# Altium PCB ClockBoard.PcbDoc
Units mil, origin at the board's own origin, x right, y up, seen from the top; angles counter-clockwise.
Board outline 6300 x 1510 mil, 2 copper layers (Top Layer, Bottom Layer); 37 components, 44 nets, 160 pads, 67 vias.
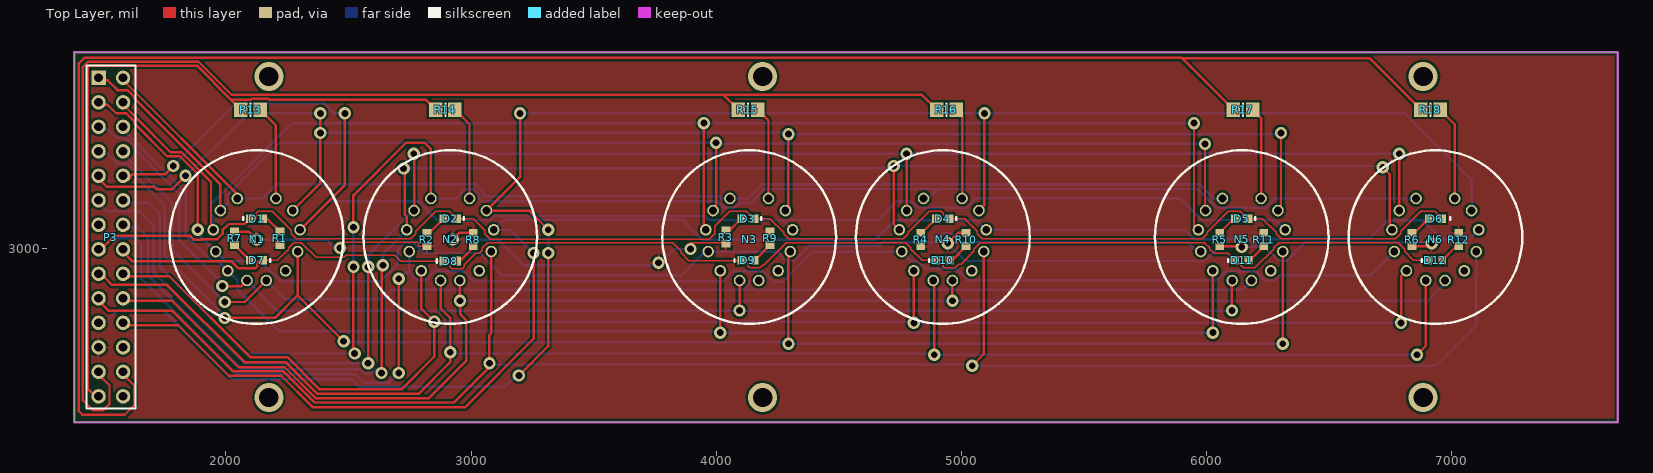
[diagram p0: Top Layer view]
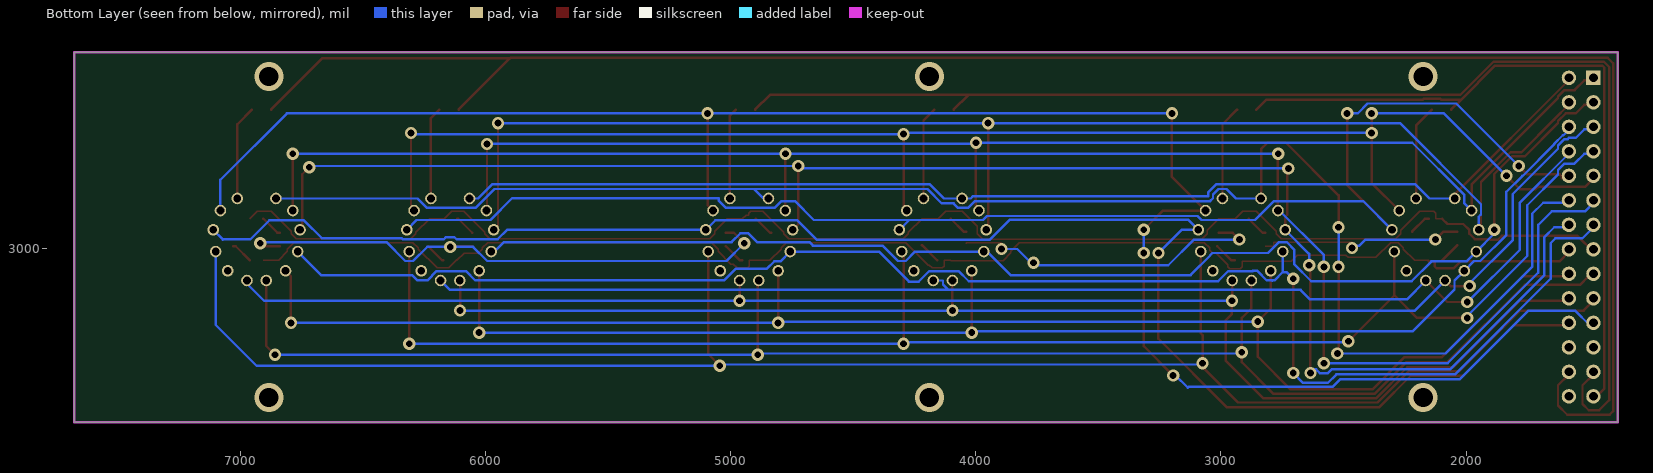
[diagram p1: Bottom Layer view, seen from below]

## Layer stack, top to bottom
Top Solder: solder mask 0.4, Solder Resist, Dk 3.5
Top Layer: signal copper 1.4
Dielectric 1: dielectric 12.6, FR-4, Dk 4.8
Bottom Layer: signal copper 1.4
Bottom Solder: solder mask 0.4, Solder Resist, Dk 3.5

## Board outline
1380,2290 7680,2290 7680,3800 1380,3800

## Design rules (kind name [scope] priority, off if disabled: settings)
Clearance [All] p1: gap=10 ignorepadtopadclearanceinfootprint=FALSE except(0: Arc-Hole Track-Hole SMDPad-Hole THPad-Hole Via-Hole Fill-Hole Poly-Hole Region-Hole Text-Hole; 6: Arc-Arc Arc-Track Track-Track)
ComponentClearance [All] p1: gap=0 collisioncheckmode=3 verticalgap=10 showdistances=FALSE
PolygonConnect [All] p1: connectstyle=Relief reliefconductorwidth=10 reliefentries=4 polygonreliefangle="90 Angle" airgapwidth=10
RoutingVias [All] p1: holewidth=28 width=50 viastyle="Through Hole" minholewidth=28 minwidth=50 maxholewidth=28 maxwidth=50
SolderMaskExpansion [All] p1: expansion=4
Width [All] p1: maxlimit=25 minlimit=6 preferedwidth=10 bottomlayer_minwidth=8 minimp=50.000000 maximp=50.000000 favimp=50.000000
29 further rules are at their usual default settings.

## Components (designator, comment, footprint, x,y, rotation, side; value= is the part's Value field where it differs from the comment)
D1 "BlueLED" 1608[0603] 2125,3120 r180 top
D2 "BlueLED" 1608[0603] 2915,3120 r0 top
D3 "BlueLED" 1608[0603] 4130,3120 r0 top
D4 "BlueLED" 1608[0603] 4925,3120 r0 top
D5 "BlueLED" 1608[0603] 6145,3120 r0 top
D6 "BlueLED" 1608[0603] 6935,3120 r0 top
D7 "BlueLED" 1608[0603] 2125,2950 r0 top
D8 "BlueLED" 1608[0603] 2915,2947.32 r180 top
D9 "BlueLED" 1608[0603] 4130,2950 r180 top
D10 "BlueLED" 1608[0603] 4925,2950 r180 top
D11 "BlueLED" 1608[0603] 6145,2950 r180 top
D12 "BlueLED" 1608[0603] 6935,2950 r180 top
N1 "IN-8-2: medium numeric frontview nixie tube" IN-8-2 2125,3045 r180 top locked
N2 "IN-8-2: medium numeric frontview nixie tube" IN-8-2 2915,3045 r180 top locked
N3 "IN-8-2: medium numeric frontview nixie tube" IN-8-2 4135,3045 r180 top locked
N4 "IN-8-2: medium numeric frontview nixie tube" IN-8-2 4925,3045 r180 top locked
N5 "IN-8-2: medium numeric frontview nixie tube" IN-8-2 6145,3045 r180 top locked
N6 "IN-8-2: medium numeric frontview nixie tube" IN-8-2 6935,3045 r180 top locked
P3 "Header 14X2A" HDR2X14_CEN 1480,3695 r270 top
R1 "Res1" 1608[0603] 2220,3040 r90 top value=1K
R2 "Res1" 1608[0603] 2820,3035 r90 top value=1K
R3 "Res1" 1608[0603] 4040,3045 r90 top value=1K
R4 "Res1" 1608[0603] 4835,3035 r90 top value=1K
R5 "Res1" 1608[0603] 6055,3035 r90 top value=1K
R6 "Res1" 1608[0603] 6840,3035 r90 top value=1K
R7 "Res1" 1608[0603] 2035,3040 r270 top value=1K
R8 "Res1" 1608[0603] 3009.41,3035 r270 top value=1K
R9 "Res1" 1608[0603] 4220,3040 r270 top value=1K
R10 "Res1" 1608[0603] 5020,3035 r270 top value=1K
R11 "Res1" 1608[0603] 6235,3035 r270 top value=1K
R12 "Res1" 1608[0603] 7030,3035 r270 top value=1K
R13 "Res1" 6-0805_M 2100,3565 r180 top value=20K
R14 "Res1" 6-0805_M 2895,3565 r180 top value=20K
R15 "Res1" 6-0805_M 4130,3565 r180 top value=20K
R16 "Res1" 6-0805_M 4940,3565 r180 top value=20K
R17 "Res1" 6-0805_M 6150,3565 r180 top value=20K
R18 "Res1" 6-0805_M 6915,3565 r180 top value=20K

## Footprints (in the part's own frame and the unit in brackets; to place one, negate y for a bottom-side part, rotate by r counter-clockwise, add the part's x,y. Pads: shape width x height; smd on the part's side, far side on the other; paste and mask are expansions set on the pad)
6-0805_M [mm] "Chip Resistor, Body 2.0x1.2mm, IPC Low Density"
  rect 1.4x1.5 smd: 1(-1,0) 2(1,0)
  silkscreen extent 0,-0.65 0,0.65, body extent -1.07,-0.7 1.07,0.7, height 0.7
1608[0603] [mm] "Chip Capacitor, Body 1.6x0.8mm, IPC High Density"
  rect 0.8x0.9 smd: 1(-0.7,0) 2(0.7,0)
  body extent -0.87,-0.48 0.87,0.48, height 1.3
HDR2X14_CEN [mm] "Connector; Header; 14x2 Position"
  rect 1.5x1.5 hole 0.9: 1(0,0)
  round 1.5 hole 0.9: 2(2.54,0) 3(5.08,0) 4(7.62,0) 5(10.16,0) 6(12.7,0) 7(15.24,0) 8(17.78,0) 9(20.32,0) 10(22.86,0) 11(25.4,0) 12(27.94,0) 13(30.48,0) 14(33.02,0) 15(0,2.54) 16(2.54,2.54) 17(5.08,2.54) 18(7.62,2.54) 19(10.16,2.54) 20(12.7,2.54) 21(15.24,2.54) 22(17.78,2.54) 23(20.32,2.54) 24(22.86,2.54) 25(25.4,2.54) 26(27.94,2.54) 27(30.48,2.54) 28(33.02,2.54)
  silkscreen extent -1.27,-1.27 34.29,3.81
IN-8-2 [mil]
  round 47.25 / inner round 60 / far side round 47.25 hole 31.5: 0(-147.64,-108.27) 1(78.74,-157.48) 2(147.64,-108.27) 3(177.17,-29.53) 4(167.32,59.06) 5(118.11,137.8) 6(39.37,177.17) 7(-39.37,177.17) 8(-167.32,59.06) 9(-177.17,-29.53) .(-118.11,137.8) A(-78.74,-157.48)
  silkscreen extent -354,-354 354,354

## Part data
D1 D2 D3 D4 D5 D6 D7 D8 D9 D10 D11 D12: library part Diode, "Default Diode", Code_JEDEC=DO-214-AB, LatestRevisionDate=17-Jul-2002, LatestRevisionNote="Re-released for DXP Platform.", PackageDescription="DO-214-AB/SMC; 2 C-Bend Leads; Body 7.9 x 5.9 mm, inc. leads (LxW)", PackageReference=SMC, PackageVersion=Sep-1996, Published=8-Jun-2000, Publisher="Altium Limited"
N1 N2 N3 N4 N5 N6: library part IN-8-2, DeviceSetName=IN-8-2, GateName_1=G$1, LibraryName=nixie-tubes, Package=IN-8-2, SymbolName_1=IN-8-2
P3: "Header, 14-Pin, Dual row", LatestRevisionDate=17-Jul-2002, LatestRevisionNote="Re-released for DXP Platform.", Publisher="Altium Limited", System=Connector
R1 R2 R3 R4 R5 R6 R7 R8 R9 R10 R11 R12 R13 R14 R15 R16 R17 R18: "Resistor", LatestRevisionDate=17-Jul-2002, LatestRevisionNote="Re-released for DXP Platform.", PackageDescription="Axial Device, Thru-Hole; 2 Leads; 0.3 in Pin Spacing", PackageReference=AXIAL-0.3, Published=8-Jun-2000, Publisher="Altium Limited"

## Via types
v1: diameter 50, hole 28, Top Layer to Bottom Layer, 61 vias
v2: diameter 118.11, hole 78.74, Top Layer to Bottom Layer, 6 vias

## Nets (pads, with @x,y where several pads share a name; then routed paths per layer and width w, separated by ;. In a path a pad name is that pad's centre, name@x,y a point inside that pad or via, vN(x,y) a via of type N, cw(c..) or ccw(c..) an arc to the next point about the centre after c; other vN are vias at no path point)
3V3: P3.12 R1.1 R2.1 R3.1 R4.1 R5.1 R6.1 R7.1 R8.1 R9.1 R10.1 R11.1 R12.1 | length 4523.6
  Top Layer w6: v1(2465,3000) 2465,3024.65 2784.3,3024.65 2784.3,3007.44 R2.1 ; v1(3895.68,2996.29) 3895.68,3022.57 4040,3022.57 R3.1
  Top Layer w10: R7.1 2092.44,3067.56 v1(2125,3035) ; v1(2925,3035) 2952.56,3062.56 R8.1 ; v1(4945,3020) 4987.56,3062.56 R10.1 ; R5.1 6142.56,3007.44 v1(6145,3005) ; R6.1 6907.44,3007.44 v1(6920,3020)
  Bottom Layer w10: v1(2125,3035) 2410,3035 2435,3010 2455,3010 v1(2465,3000) ; v1(2925,3035) 3110,3035 3215,2930 3765,2930 3831.29,2996.29 v1(3895.68,2996.29) ; v1(4945,3020) 5017.69,2947.32 5993.68,2947.32 6051.36,3005 v1(6145,3005) 6238.64,3005 6296.32,2947.32 6328.32,2947.32 6405.57,3024.57 6915.44,3024.57 v1(6920,3020)
  other v1: 3765,2940
LED1: D1.2 D2.2 D3.2 D4.2 D5.2 D6.2 P3.8 | length 6138.6
  Top Layer w6: D1.2 2123.81,3120 2123.81,3143.1 2131.43,3150.72 2188.69,3150.72 2265.55,3073.86 2265.55,3059.36 2287,3037.91 2449.16,3037.91 2449.26,3038 2722.56,3038 2722.66,3037.91 2753,3037.91 2774.45,3059.36 2774.45,3068.86 2856.31,3150.72 2911.84,3150.72 D2.2 3009.41,3120 3055.55,3073.86 3055.55,3059.36 3077.9,3037 3972.1,3037 3994.45,3059.36 3994.45,3089.1 4056.07,3150.72 4123.57,3150.72 4154.29,3120 D3.2 4219.41,3120 4275.55,3063.86 4275.55,3059.36 4297,3037.91 4763,3037.91 4784.45,3059.36 4784.45,3064.45 4870.72,3150.72 4918.57,3150.72 4926.19,3143.1 4926.19,3135 4937.56,3135 D4.2 5014.41,3120 5065.55,3068.86 5065.55,3059.36 5087,3037.91 5983,3037.91 6004.45,3059.36 6004.45,3064.45 6090.72,3150.72 6138.57,3150.72 6172.56,3116.73 D5.2 6229.41,3120 6285.55,3063.86 6285.55,3059.36 6307,3037.91 6773,3037.91 6794.45,3059.36 6794.45,3068.86 6876.31,3150.72 6931.84,3150.72 D6.2
  Top Layer w10: P3.8@1480,2985 1545,3050 1853.43,3050 1868.43,3035 1901.57,3035 1902.47,3035.91 1963.83,3035.91 1986.45,3058.53 1986.45,3073.69 2011.07,3098.31 2075.75,3098.31 D1.2
LED2: D7.2 D8.2 D9.2 D10.2 D11.2 D12.2 P3.22 | length 5874.1
  Top Layer w6: D7.2 2209.41,2950 2255.7,2996.29 2255.7,3001.11 2277.15,3022.57 2307.49,3022.57 2368.06,2962 2480.74,2962 2490.06,2971.32 2688.68,2971.32 2712.69,2947.31 D8.2 2913.81,2947.31 2913.81,2924.21 2921.43,2916.6 2963.69,2916.6 2971.31,2924.21 2971.31,2931.31 3018.69,2978.69 3033.11,2978.69 3045.7,2991.28 3045.7,3001.11 3067.15,3022.57 3822.43,3022.57 3857.68,2987.32 3857.68,2980.55 3888.92,2949.32 4101.76,2949.32 D9.2 4128.81,2950 4128.81,2926.9 4136.43,2919.28 4178.69,2919.28 4189.41,2930 4195,2930 4265.69,3000.7 4265.69,3001.11 4287.15,3022.57 4772.85,3022.57 4794.31,3001.11 4794.31,2996.29 4840.59,2950 D10.2 4923.81,2950 4923.81,2926.9 4931.43,2919.28 4973.69,2919.28 4989.41,2935 4999.41,2935 5050.72,2986.31 5050.72,2996.13 5077.15,3022.57 5992.85,3022.57 6014.31,3001.11 6014.31,2996.29 6031.9,2978.69 6088.75,2978.69 D11.2 6117.44,2953.27 6151.43,2919.28 6198.69,2919.28 6275.69,2996.29 6275.69,3001.11 6297.15,3022.57 6782.85,3022.57 6809.28,2996.13 6809.28,2986.31 6845.59,2950 D12.2
  Top Layer w10: P3.22@1580,2985 1619.17,2945.82 2022.89,2945.82 2051.43,2917.28 2119.4,2917.28 2128.19,2926.07 2128.19,2945 2150.24,2945 D7.2@2152.56,2947.32
MPX1: P3.14 R13.2 R14.2 | length 2929.4
  Top Layer w10: P3.14@1480,2385 1477.03,2385 1435.47,2426.56 1435.47,3735.74 1444.26,3744.53 1881.1,3744.53 2020.63,3605 ; R13.2 2020.63,3605 ; R14.2 2815.63,3605 2177.67,3605 2173.14,3609.53 2156.26,3609.53 2105.6,3609.53 2101.07,3605 2020.63,3605
MPX2: P3.13 R15.2 R16.2 | length 5296.8
  Top Layer w10: P3.13@1480,2485 1524.53,2440.47 1524.53,2363.44 1499.36,2338.27 1456.73,2338.27 1415.47,2379.53 1415.47,3738.37 1437.63,3760.53 1887.73,3760.53 2023.26,3625 2098.44,3625 2098.97,3625.53 4030.1,3625.53 ; R15.2 4030.1,3625.53 ; R16.2 4840.1,3625.53 4030.1,3625.53
MPX3: P3.27 R17.2 R18.2 | length 7682.4
  Top Layer w10: P3.27@1580,2485 1624.53,2440.47 1624.53,2357.8 1586.73,2320 1413.74,2320 1399.47,2334.27 1399.47,3754.47 1421.53,3776.53 5899.1,3776.53 5900.63,3775 ; R17.2 5900.63,3775 ; R18.2 6665.63,3775 5900.63,3775
NetD1_1: D1.1 R1.2 | length 89.2
  Top Layer w10: D1.1 2167.56,3120 R1.2
NetD2_1: D2.1 R2.2 | length 91.2
  Top Layer w10: R2.2 2830,3062.56 D2.1
NetD3_1: D3.1 R3.2 | length 84.2
  Top Layer w10: R3.2@4040,3067.56 4050,3067.56 D3.1
NetD4_1: D4.1 R4.2 | length 86.2
  Top Layer w10: R4.2 4840,3062.56 D4.1
NetD5_1: D5.1 R5.2 | length 86.2
  Top Layer w10: R5.2 6112.44,3120 D5.1
NetD6_1: D6.1 R6.2 | length 91.2
  Top Layer w10: R6.2 6850,3062.56 D6.1
NetD7_1: D7.1 R7.2 | length 88.3
  Top Layer w10: R7.2 D7.1
NetD8_1: D8.1 R8.2 | length 96.2
  Top Layer w10: D8.1@2942.56,2950 2957.56,2950 R8.2@3015,3007.44
NetD9_1: D9.1 R9.2 | length 88.3
  Top Layer w10: D9.1 R9.2
NetD10_1: D10.1 R10.2 | length 91.2
  Top Layer w10: D10.1 4962.56,2950 R10.2
NetD11_1: D11.1 R11.2 | length 86.2
  Top Layer w10: D11.1 6177.56,2950 R11.2
NetD12_1: D12.1 R12.2 | length 91.2
  Top Layer w10: D12.1 7020,3007.44 R12.2
NetN1_A: N1.A R13.1 | length 389.2
  Top Layer w10: R13.1 2203.74,3500.63 N1.A
NetN2_A: N2.A R14.1 | length 387.1
  Top Layer w10: R14.1 2993.74,3505.63 N2.A
NetN3_A: N3.A R15.1 | length 380.9
  Top Layer w10: R15.1 4213.74,3520.63 N3.A
NetN4_A: N4.A R16.1 | length 372.6
  Top Layer w10: R16.1 5003.74,3540.63 N4.A
NetN5_A: N5.A R17.1 | length 376.8
  Top Layer w10: R17.1 6223.74,3530.63 N5.A
NetN6_A: N6.A R18.1 | length 387.1
  Top Layer w10: R18.1 7013.74,3505.63 N6.A
TM1: N1.1 N3.1 N5.1 P3.15 | length 4801.8
  Top Layer w10: P3.15@1580,3685 1580.6,3685 2046.26,3219.34 N1.1
  Bottom Layer w10: N1.1 2149.12,3202.48 2207.74,3261.11 3018.02,3261.11 3052.36,3226.76 3052.36,3211.89 4011.64,3211.89 4021.06,3202.48 N3.1 4130.83,3202.48 4189.46,3261.11 5972.43,3261.11 6031.06,3202.48 N5.1
TM2: N1.2 N3.2 N5.2 P3.1 | length 5494.8
  Top Layer w10: P3.1@1480,3685 1517.03,3685 1557.03,3645 1597.97,3645 1624.53,3618.44 1624.53,3612.83 1977.36,3260 N1.2 ; N3.2 3985,3155.63 4000,3170.63 v1(4000,3430) ; v1(5995,3425) 5995,3155.63 N5.2
  Bottom Layer w10: N1.2 2007.63,3183.55 2007.63,3218.48 2219.16,3430 v1(4000,3430) 4005,3425 v1(5995,3425)
TM3: N1.3 N3.3 N5.3 P3.16 | length 5877.6
  Top Layer w10: P3.16@1580,3585 1580.6,3585 1640.53,3525.07 1640.53,3524.47 1774,3391 1818.2,3391 1938.73,3270.46 1938.73,3074.53 N1.3 N1.3@1947.83,3092.17 ; v1(3950,3510) 3950,3517.47 3948.74,3518.74 3948.74,3082.36 3950,3082.36 N3.3 ; v1(5950,3510) 5950,3092.36 N5.3
  Bottom Layer w10: N1.3 1947.83,3128.18 1938.73,3137.27 1938.73,3178.74 2270,3510 v1(3950,3510) 5930,3510 5940,3520 v1(5950,3510)
TM4: N1.4 N3.4 N5.4 P3.2 | length 5233.4
  Top Layer w10: P3.2@1480,3585 1517.03,3585 1552.03,3550 1592.97,3550 1624.53,3518.44 1624.53,3510.47 1760,3375 1811.57,3375 1885,3301.57 v1(1885,3075)
  Bottom Layer w10: v1(1885,3075) 1885,3058.62 N1.4 1997.8,2945.82 2141,2945.82 2221.82,2865 2631.57,2865 2700,2933.43 2700,2992.88 2731.68,3024.57 2763.68,3024.57 2808.24,2980 3035,2980 3043.7,2971.3 3043.7,2969.94 3123.64,2890 3858.12,2890 3954.06,2985.94 N3.4 4247.7,2985.94 4286.32,2947.32 4318.32,2947.32 4381,3010 4665,3010 4679.56,3024.57 4893,3024.57 4928.43,3060 4961.57,3060 4997,3024.57 5925.44,3024.57 5964.06,2985.94 N5.4
TM5: N1.5 N3.5 N5.5 P3.17 | length 5426.3
  Top Layer w10: N1.5@2002.28,2907.2 N1.5 ; v1(4016.9,2655) N3.5 ; v1(6026.89,2655) N5.5
  Bottom Layer w10: P3.17@1580,3485 1580,3483.43 1602.9,3460.53 1605.07,3460.53 1640.53,3425.07 1640.53,3422.9 1768.43,3295 1770,3295 1835,3230 1835,3054 1941.68,2947.32 1966.78,2947.32 N1.5 2047.01,2867.09 2047.01,2830.74 2217.74,2660 4011.9,2660 v1(4016.9,2655) v1(6026.89,2655)
TM6: N1.6 N3.6 N5.6 P3.3 | length 5321.1
  Top Layer w10: v1(1985,2845) 2062.8,2845 N1.6 ; v1(4095.63,2745) N3.6 ; v1(6105,2745) 6105,2867.2 N5.6
  Bottom Layer w10: P3.3@1480,3485 1517.03,3485 1552.03,3450 1580,3450 1585.47,3444.53 1598.44,3444.53 1624.53,3418.44 1624.53,3405.47 1810,3220 1810,3031.45 1985,2856.45 v1(1985,2845) ; N1.6 2208.46,2745 v1(4095.63,2745) v1(6105,2745)
TM7: N1.7 N3.7 N5.7 P3.18 | length 5155.9
  Top Layer w10: v1(1995,2780) 2076.54,2780 N1.7
  Bottom Layer w10: P3.18@1580,3385 1580.6,3385 1780,3185.6 1780,2993.43 1993.43,2780 v1(1995,2780) ; N1.7 2241.46,2790.74 2636.57,2790.74 2675.04,2829.2 4111.63,2829.2 ; N3.7 4134.26,2867.83 4134.26,2851.83 4111.63,2829.2 ; N5.7 6145.74,2829.2 4111.63,2829.2
TM8: N1.8 N3.8 N5.8 P3.4 | length 6299.8
  Top Layer w10: v1(1995,2715) 2199.64,2715 2292.32,2807.68 ; N1.8 2292.32,2807.68 ; v1(2480,2620) 2292.32,2807.68 ; v1(4295,2610) 4295,2978.62 N3.8 ; v1(6312.32,2610) N5.8
  Bottom Layer w10: P3.4@1480,3385 1517.03,3385 1557.5,3344.53 1598.44,3344.53 1624.53,3318.44 1624.53,3300.47 1750,3175 1750,2968.43 1995,2723.43 v1(1995,2715) ; v1(2480,2620) 2485,2615 4290,2615 v1(4295,2610) v1(6312.32,2610)
TM9: N1.9 N3.9 N5.9 P3.19 | length 5893
  Top Layer w10: P3.19@1580,3285 1608.53,3285 1608.53,3291.63 1617.9,3301 1751,3301 v1(1785,3335) ; N1.9 2485,3257.36 v1(2485,3550)
  Bottom Layer w10: v1(1785,3335) 2040,3590 2401.57,3590 2441.57,3550 v1(2485,3550) ; N1.9 2419.53,3191.89 2783.36,3191.89 2860.61,3114.64 3078.64,3114.64 3094.99,3131 3955.01,3131 3971.36,3114.64 4272.06,3114.64 ; N3.9 4272.06,3114.64 ; N5.9 6282.06,3114.64 5981.36,3114.64 5892.4,3203.61 5050,3203.61 5050,3194.12 5019.74,3163.86 4821.4,3163.86 4793.36,3191.89 4738.73,3191.89 4661.48,3114.64 4272.06,3114.64
TM10: N1.0 N3.0 N5.0 P3.5 | length 6057.8
  Top Layer w10: P3.5@1480,3285 1515,3250 1706.96,3250 1716.49,3240.47 1780.47,3240.47 v1(1835,3295) ; N1.0 2385,3265.63 v1(2385,3470) v1(2385,3550) ; N3.0 4295,3165.63 v1(4295,3465) ; N5.0 6305,3165.63 v1(6305,3470)
  Bottom Layer w10: v1(1835,3295) 2090,3550 v1(2385,3550) ; v1(2385,3470) 4285,3470 4290,3465 v1(4295,3465) 6300,3465 v1(6305,3470)
TM11: N2.1 N4.1 N6.1 P3.20 | length 6822.6
  Top Layer w10: v1(2520,2923.43) 2520,2575 v1(2525,2570) ; v1(2520,3085) 2520,3215 2735,3430 2810,3430 2836.26,3403.74 N2.1
  Bottom Layer w10: P3.20@1580,3185 1685,3185 1730,3140 1730,2923.43 2083.43,2570 v1(2525,2570) ; v1(2520,2923.43) v1(2520,3085) ; N2.1 2939.12,3202.48 2977.74,3241.11 3009.74,3241.11 3032.36,3218.48 3032.36,3203.61 3044.08,3191.89 4003.36,3191.89 4031.4,3163.86 4072.26,3163.86 4090.88,3182.48 4139.12,3182.48 4197.74,3241.11 4905,3241.11 ; N4.1 4866.38,3202.48 4905,3241.11 ; N6.1 6278.36,3202.48 6239.74,3163.86 6041.4,3163.86 5964.15,3241.11 4905,3241.11
TM12: N2.2 N4.2 N6.2 P3.6 | length 6906.2
  Top Layer w10: v1(2580,2530) v1(2580,2923.43) ; v1(2766.36,3385) 2767.36,3384 N2.2 ; N4.2 v1(4777.36,3385) ; N6.2 v1(6787.36,3385)
  Bottom Layer w10: P3.6@1480,3185 1515,3150 1650,3150 1705,3095 1705,2900 2075,2530 v1(2580,2530) ; v1(2580,2923.43) 2580,2971.32 2761.95,3153.27 N2.2 ; v1(2766.36,3385) v1(4777.36,3385) v1(6787.36,3385)
TM13: N2.3 N4.3 N6.3 P3.21 | length 6829.7
  Top Layer w10: v1(2635,2490) v1@2635,2915.78 ; v1(2640,2930) v1@2640,2940.78 ; v1(2725,3325) 2728.74,3321.26 2728.74,3137.27 2737.83,3128.18 N2.3 ; v1(4725,3335) 4725,3097.36 N4.3 ; v1(6720,3330) 6748.73,3301.26 6748.73,3074.53 N6.3
  Bottom Layer w10: P3.21@1580,3085 1640,3085 1680,3045 1680,2890 2065,2505 2548.43,2505 2563.43,2490 2596.57,2490 2611.57,2505 2620,2505 v1(2635,2490) ; v1(2640,2930) 2640,2976.7 N2.3 ; v1(2725,3325) 4715,3325 v1(4725,3335) 6715,3335 v1(6720,3330)
TM14: N2.4 N4.4 N6.4 P3.7 | length 6395.3
  Top Layer w10: v1(2705,2490) v1(2705,2875)
  Bottom Layer w10: P3.7@1480,3085 1525,3040 1635,3040 1655,3020 1655,2875 2045,2485 2529.05,2485 2564.05,2450 2665,2450 v1(2705,2490) ; v1(2705,2875) 2731.79,2901.79 2747.68,2901.79 ; N2.4 2747.68,2901.79 ; N6.4 6671.74,2890 6300.53,2890 6279.11,2868.57 6238.25,2868.57 6200.37,2906.45 6080.77,2906.45 6042.89,2868.57 5027.11,2868.57 4980.69,2915 4853.71,2915 4822.89,2945.82 4797.8,2945.82 N4.4 4395.94,2985.94 4273.46,2863.46 4233.36,2863.46 4190.37,2906.45 4070.77,2906.45 4029.31,2865 3920.07,2865 3052.36,2865 3011.82,2865 2970.37,2906.45 2870.74,2906.45 2870,2907.2 2851.51,2907.2 2812.89,2868.57 2791.49,2868.57 2790,2867.09 2788.51,2868.57 2780.89,2868.57 2747.68,2901.79
TM15: N2.5 N4.5 N6.5 P3.23 | length 6269.4
  Top Layer w10: P3.23@1580,2885 1768.43,2885 2098.43,2555 2250.51,2555 2382.31,2423.19 2716.04,2423.19 2850,2557.15 v1(2850,2700) 2796.89,2753.11 N2.5 ; v1(4806.89,2695) N4.5 ; v1(6795,2695) 6795,2885.31 N6.5
  Bottom Layer w10: v1(2850,2700) 4801.89,2700 v1(4806.89,2695) v1(6795,2695)
TM16: N2.6 N4.6 N6.6 P3.9 | length 6608.2
  Top Layer w10: P3.9@1480,2885 1500,2885 1535,2850 1760,2850 2075,2535 2243.49,2535 2373.49,2405 2785,2405 2915,2535 v1(2915,2575) 2915,2715 2875.63,2754.37 N2.6 ; N4.6 4890,2863.46 v1(4890,2565) ; v1(6860,2565) 6895.63,2600.63 N6.6
  Bottom Layer w10: v1(2915,2575) 2920,2570 4885,2570 v1(4890,2565) v1(6860,2565)
TM17: N2.7 N4.7 N6.7 P3.24 | length 6110.2
  Top Layer w10: P3.24@1580,2785 1780,2785 2051,2514 2192.62,2514 2239.82,2514 2365.82,2388 2828,2388 2980,2540 2980,2706.57 2955,2731.57 v1(2955,2785) 2954.37,2785.63 N2.7 ; v1(4964.37,2785) N4.7
  Bottom Layer w10: v1(2955,2785) v1(4964.37,2785) 6905,2785 6974.37,2854.37 N6.7
TM18: N2.8 N4.8 N6.8 P3.10 | length 7185.9
  Top Layer w10: P3.10@1480,2785 1520,2745 1780,2745 2027,2498 2233.2,2498 2361.2,2370 2930,2370 3075,2515 v1(3075,2530) 3075,2645.36 3082.32,2652.68 N2.8 ; v1(5045,2520) 5092.32,2567.32 N4.8
  Bottom Layer w10: v1(3075,2530) 3080,2525 5040,2525 v1(5045,2520) 6935,2520 7102.32,2687.32 N6.8
TM19: N2.9 N4.9 N6.9 P3.25 | length 6704.3
  Top Layer w10: P3.25@1580,2685 1805,2685 2011,2479 2225.7,2479 2354.7,2350 2975,2350 3255,2630 v1(3255,2980)
  Bottom Layer w10: v1(3255,2980) 3160.47,3074.53 N2.9 3132.64,3115 3862.74,3115 3942.74,3035 4650,3035 4728.15,3113.16 5063.55,3113.16 N4.9 5913.21,3074.53 5951.83,3035.91 6119.34,3035.91 6128.43,3045 6161.57,3045 6170.66,3035.91 6338.17,3035.91 6342.83,3040.57 6669.24,3040.57 6741.83,3113.16 6883.41,3113.16 6960.66,3035.91 7071.73,3035.91 7072.64,3035 N6.9
TM20: N2.0 N4.0 N6.0 P3.11 | length 7800.8
  Top Layer w10: v1(3195,2480) 3315,2600 v1(3315,2980) ; v1(3200,3550) 3200,3290.63 N2.0 3236.73,3153.27 v1(3315,3075) ; N4.0 5095,3175.63 v1(5095,3550)
  Bottom Layer w10: P3.11@1480,2685 1495,2685 1555,2745 1745,2745 2025.94,2464.05 2514.19,2464.05 2544.24,2434 3131,2434 3135,2430 3185,2480 v1(3195,2480) ; v1(3200,3550) v1(5095,3550) 6811.73,3550 7082.64,3279.09 N6.0 ; v1(3315,2980) v1(3315,3075)
pads on no net: N1.. N2.. N3.. N4.. N5.. N6.. P3.26 P3.28
copper on no net:
  other v2: 2175,2390 4190,2390 6885,2390 2175,3700 4190,3700 6885,3700

## Polygon pours and split planes (outlines as drawn)
no net on Bottom Layer "Bottom Layer-No Net" (solid, pour order 2): 1380,3800
3V3 on Top Layer "Top Layer-3V3" (solid, pour order 4): 1380,3800 1380,2290 7680,2290 7680,3800

## Keep-outs
Keep-Out Layer:
  the board outline again, w10

## Silkscreen, mask and mechanical layers (free items; w line width, h text height)
Top Overlay:
  lines w10: 2070,3115 2070,3125 ; 2180,2945 2180,2955 ; 2860,2940 2860,2955 ; 2970,3115 2970,3125 ; 4075,2945 4075,2955 ; 4185,3115 4185,3125 ; 4870,2945 4870,2955 ; 4980,3115 4980,3125 ; 6090,2945 6090,2955 ; 6200,3115 6200,3125 ; 6880,2945 6880,2955 ; 6995,3115 6995,3125